# Altium PCB pcb.PcbDoc
Units mm, origin at the board's own origin, x right, y up, seen from the top; angles counter-clockwise.
Board outline 100 x 50 mm, 2 copper layers (Top Layer, Bottom Layer); 52 components, 31 nets, 114 pads, 0 vias.
Unrouted connection lines stored in the file: 83.
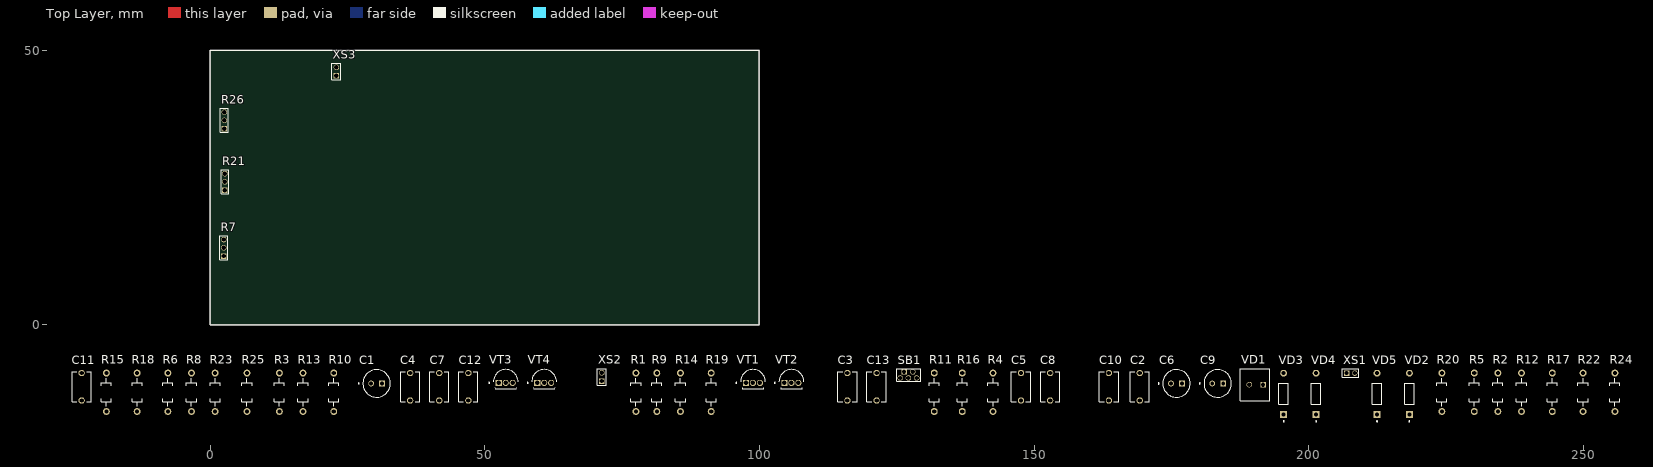
[diagram p0: Top Layer view]
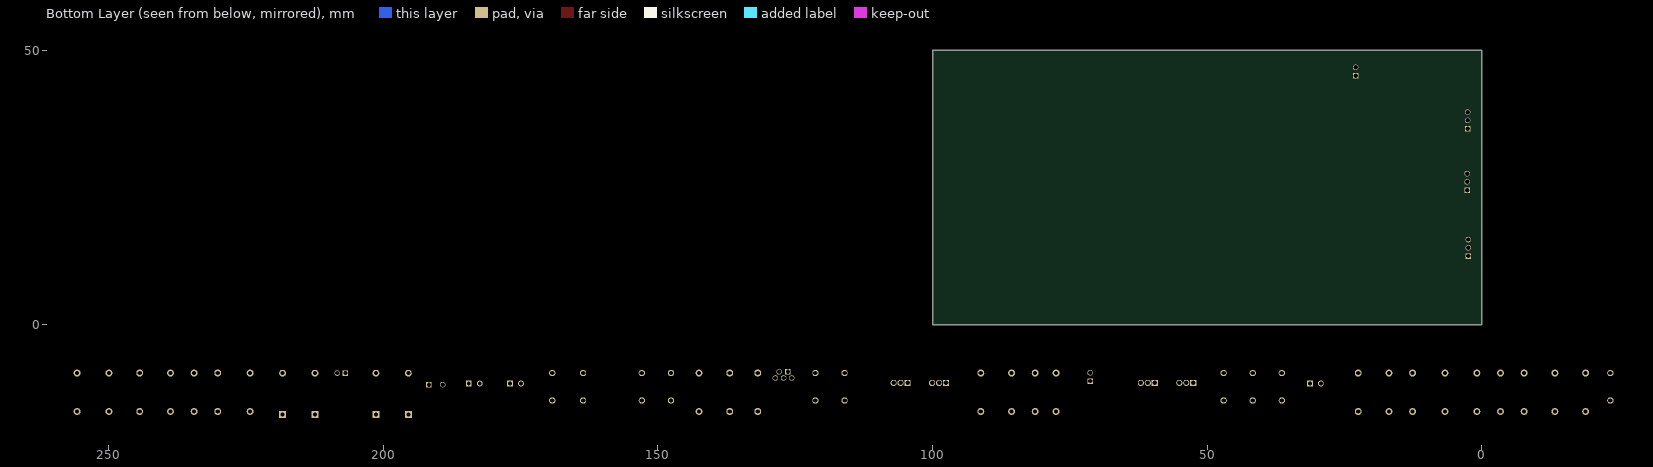
[diagram p1: Bottom Layer view, seen from below]

## Layer stack, top to bottom
Top Solder: solder mask 0.0102, Solder Resist, Dk 3.5
Top Layer: signal copper 0.0356
Dielectric 1: dielectric 0.32, FR-4, Dk 4.8
Bottom Layer: signal copper 0.0356
Bottom Solder: solder mask 0.0102, Solder Resist, Dk 3.5

## Board outline
0,0 0,50 100,50 100,0

## Design rules (kind name [scope] priority, off if disabled: settings)
Clearance [All] p1: gap=0.254 ignorepadtopadclearanceinfootprint=FALSE
PolygonConnect [All] p1: connectstyle=Relief reliefconductorwidth=0.254 reliefentries=4 polygonreliefangle="90 Angle" airgapwidth=0.254
RoutingVias [All] p1: holewidth=0.711 width=1.27 viastyle="Through Hole" minholewidth=0.711 minwidth=1.27 maxholewidth=0.711 maxwidth=1.27
SolderMaskExpansion [All] p1: expansion=0.102 istentingtop=FALSE
Width [All] p1: maxlimit=0.254 minlimit=0.254 preferedwidth=0.254
30 further rules are at their usual default settings.

## Components (designator, comment, footprint, x,y, rotation, side; value= is the part's Value field where it differs from the comment)
C1 "1 мкФ" CE 30.325,-10.7 r0 top
C2 "470 пФ" СC 169.225,-11.3 r90 top
C3 "1 мкФ" СC 116.025,-11.3 r90 top
C4 "100 нФ" СC 36.425,-11.3 r90 top
C5 "470 пФ" СC 147.625,-11.3 r90 top
C6 "1 мкФ" CE 175.925,-10.7 r0 top
C7 "100 нФ" СC 41.725,-11.3 r90 top
C8 "470 пФ" СC 152.925,-11.3 r90 top
C9 "1 мкФ" CE 183.425,-10.7 r0 top
C10 "4 нФ" СC 163.625,-11.3 r90 top
C11 "10 нФ" СC -23.375,-11.3 r90 top
C12 "100 нФ" СC 47.025,-11.3 r90 top
C13 "100 нФ" СC 121.325,-11.3 r90 top
R1 "39 кОм" R 77.525,-12.3 r90 top
R2 "390 Ом" R 234.424,-12.3 r90 top
R3 "47 кОм" R 12.625,-12.3 r90 top
R4 "470 кОм" R 142.525,-12.3 r90 top
R5 "10 кОм" R 230.124,-12.3 r90 top
R6 "100 Ом" R -7.675,-12.3 r90 top
R7 "100 кОм" RP 2.5,14 r90 top
R8 "1 кОм" R -3.375,-12.3 r90 top
R9 "10 кОм" R 81.325,-12.3 r90 top
R10 "100 кОм" R 22.525,-12.3 r90 top
R11 "470 кОм" R 131.825,-12.3 r90 top
R12 "10 кОм" R 238.724,-12.3 r90 top
R13 "150 Ом" R 16.925,-12.3 r90 top
R14 "10 кОм" R 85.625,-12.3 r90 top
R15 "100 кОм" R -18.875,-12.3 r90 top
R16 "470 кОм" R 136.925,-12.3 r90 top
R17 "10 кОм" R 244.324,-12.3 r90 top
R18 "150 Ом" R -13.275,-12.3 r90 top
R19 "39 кОм" R 91.225,-12.3 r90 top
R20 "22 кОм" R 224.225,-12.3 r90 top
R21 "100 кОм" RP 2.7,26 r90 top
R22 "430 кОм" R 249.924,-12.3 r90 top
R23 "100 кОм" R 0.925,-12.3 r90 top
R24 "15 кОм" R 255.724,-12.3 r90 top
R25 "3,3 кОм" R 6.725,-12.3 r90 top
R26 "100 кОм" RP 2.6,37.2 r90 top
SB1 "3PDT" 3PDT 127.125,-9.1 r0 top
VD1 "Led" LED 190.425,-10.9 r0 top
VD2 "Diode" D 218.325,-12.6 r90 top
VD3 "Diode" D 195.425,-12.6 r90 top
VD4 "Diode" D 201.325,-12.6 r90 top
VD5 "Diode" D 212.425,-12.6 r90 top
VT1 "Transistor" BC239C 98.825,-10.6 r0 top
VT2 "Transistor" BC239C 105.825,-10.6 r0 top
VT3 "Transistor" BC239C 53.825,-10.6 r0 top
VT4 "Transistor" BC239C 60.825,-10.6 r0 top
XS1 "Connector +9V" CON 207.625,-8.8 r0 top
XS2 "Connector Jack IN" CON 71.325,-9.5 r90 top
XS3 "Connector Jack OUT" CON 23,46.1 r90 top

## Footprints (in the part's own frame and the unit in brackets; to place one, negate y for a bottom-side part, rotate by r counter-clockwise, add the part's x,y. Pads: shape width x height; smd on the part's side, far side on the other; paste and mask are expansions set on the pad)
3PDT [mm] "5 pads"
  rect 1x1 hole 0.8 paste-2539.97 mask+0.102: 1(-0.8,0.5)
  round 1 hole 0.8 paste-2539.97 mask+0.102: 2(0.8,0.5) 11(-1.5,-0.6) 21(0,-0.6) 22(1.5,-0.6)
  silkscreen extent -2.1,-1.2 2.2,1.1
BC239C [mm] "TO-92"
  rect 1.12x1.12 / inner round 1.12 / far side rect 1.12x1.12 hole 0.83: 1(-1.27,0)
  round 1.12 hole 0.83: 2(0,0) 3(1.27,0)
  silkscreen extent -3.11,-1.1 2.26,2.45, body extent -2.4,-1.52 2.4,2.41, height 5.49
CE [mm] "50v 1uF"
  rect 1.05x1.05 hole 0.7: 1(1,0)
  round 1.05 hole 0.7: 2(-1,0)
  silkscreen extent -3.35,-2.5 2.5,2.5, body extent -2.5,-2.5 2.5,2.5, height 12
CON [mm]
  rect 1x1 hole 0.8 paste-2539.97 mask+0.102: 1(-0.75,0)
  round 1 hole 0.8 paste-2539.97 mask+0.102: 2(0.75,0)
  silkscreen extent -1.5,-0.8 1.5,0.8
D [mm] "1N914"
  rect 1.238x1.238 / inner round 1.238 / far side rect 1.238x1.238 hole 0.73: 1(-3.768,0)
  round 1.238 hole 0.73: 2(3.768,0)
  silkscreen extent -5.1,-0.86 1.9,0.86, body extent -4.05,-0.92 3.96,0.99, height 1.9
LED [mm]
  rect 1x1 hole 0.8 paste-2539.97 mask+0.102: 1(1.25,0)
  round 1 hole 0.8 paste-2539.97 mask+0.102: 2(-1.25,0)
  silkscreen extent -2.9,-2.9 2.5,2.9, body extent -2.9,-2.9 2.5,2.9, height 30.6
R [mm]
  round 1.258 hole 0.75: 1(-3.5,0) 2(3.5,0)
  silkscreen extent -2.55,-0.92 2.55,0.92, body extent -3.72,-0.92 3.72,0.92, height 1.85
RP [mm]
  rect 1x1 hole 0.8 paste-2539.97 mask+0.102: 1(-1.5,0)
  round 1 hole 0.8 paste-2539.97 mask+0.102: 2(0,0) 3(1.5,0)
  silkscreen extent -2.2,-0.7 2.2,0.7
СC [mm]
  round 1.15 hole 0.8: 1(-2.5,0) 2(2.5,0)
  silkscreen extent -2.75,-1.75 2.75,1.75, body extent -2.75,-1.75 2.75,1.75, height 6

## Part data
C1 C6 C9: library part "Capacitor Electrolytic"
C2 C3 C4 C5 C7 C8 C10 C11 C12 C13: library part "Capacitor Ceramic"
R1 R2 R3 R4 R5 R6 R8 R9 R10 R11 R12 R13 R14 R15 R16 R17 R18 R19 R20 R22 R23 R24 R25: library part Resistor
R7 R21 R26: library part Potentiometer
VD1: "RED"

## Nets (pads, with @x,y where several pads share a name; then routed paths per layer and width w, separated by ;. In a path a pad name is that pad's centre, name@x,y a point inside that pad or via, vN(x,y) a via of type N, cw(c..) or ccw(c..) an arc to the next point about the centre after c; other vN are vias at no path point)
GND: C11.1 R3.1 R6.1 R8.1 R10.1 R13.1 R15.1 R18.1 R20.2 R23.1 R25.1 R26.1 VD1.1 XS1.2 XS2.2 XS3.2
NetC1_1: C1.1 R1.2
NetC1_2: C1.2 C2.1 R3.2 R4.1 VT1.2
NetC2_2: C2.2 C3.1 R4.2 R5.1 VT1.1
NetC3_2: C3.2 R7.2
NetC4_1: C4.1 R7.3
NetC4_2: C4.2 R9.1
NetC5_1: C5.1 C6.1 R9.2 R10.2 R11.1 VT2.2
NetC5_2: C5.2 C7.1 R11.2 R12.1 VD2.2 VD3.1 VT2.1
NetC6_2: C6.2 VD2.1 VD3.2
NetC7_2: C7.2 R14.1
NetC8_1: C8.1 C9.1 R14.2 R15.2 R16.1 VT3.2
NetC8_2: C8.2 C10.1 R16.2 R17.1 R19.1 VD4.1 VD5.2 VT3.1
NetC9_2: C9.2 VD4.2 VD5.1
NetC10_2: C10.2 R20.1 R21.2
NetC11_2: C11.2 R19.2 R21.1
NetC12_1: C12.1 R22.1 R23.2 VT4.2
NetC12_2: C12.2 R21.3
NetC13_1: C13.1 R26.2
NetC13_2: C13.2 R24.1 VT4.1
NetR1_1: R1.1 SB1.21
NetR2_1: R2.1 VD1.2
NetR2_2: R2.2 R5.2 R12.2 R17.2 R22.2 R24.2 SB1.11
NetR6_2: R6.2 VT1.3
NetR7_1: R7.1 R8.2
NetR13_2: R13.2 VT2.3
NetR18_2: R18.2 VT3.3
NetR25_2: R25.2 VT4.3
NetR26_3: R26.3 SB1.22 XS3.1
NetSB1_1: SB1.1 XS1.1
NetSB1_2: SB1.2 XS2.1

## Silkscreen, mask and mechanical layers (free items; w line width, h text height)
Top Overlay:
  the board outline again, w0.015